# Altium PCB QUTMS-TSAL-B00.PcbDoc
Units mil, origin at the board's own origin, x right, y up, seen from the top; angles counter-clockwise.
Board outline 850 x 1875 mil, 2 copper layers (Top Layer, Bottom Layer); 28 components, 17 nets, 88 pads, 18 vias.
Unrouted connection lines stored in the file: 14.
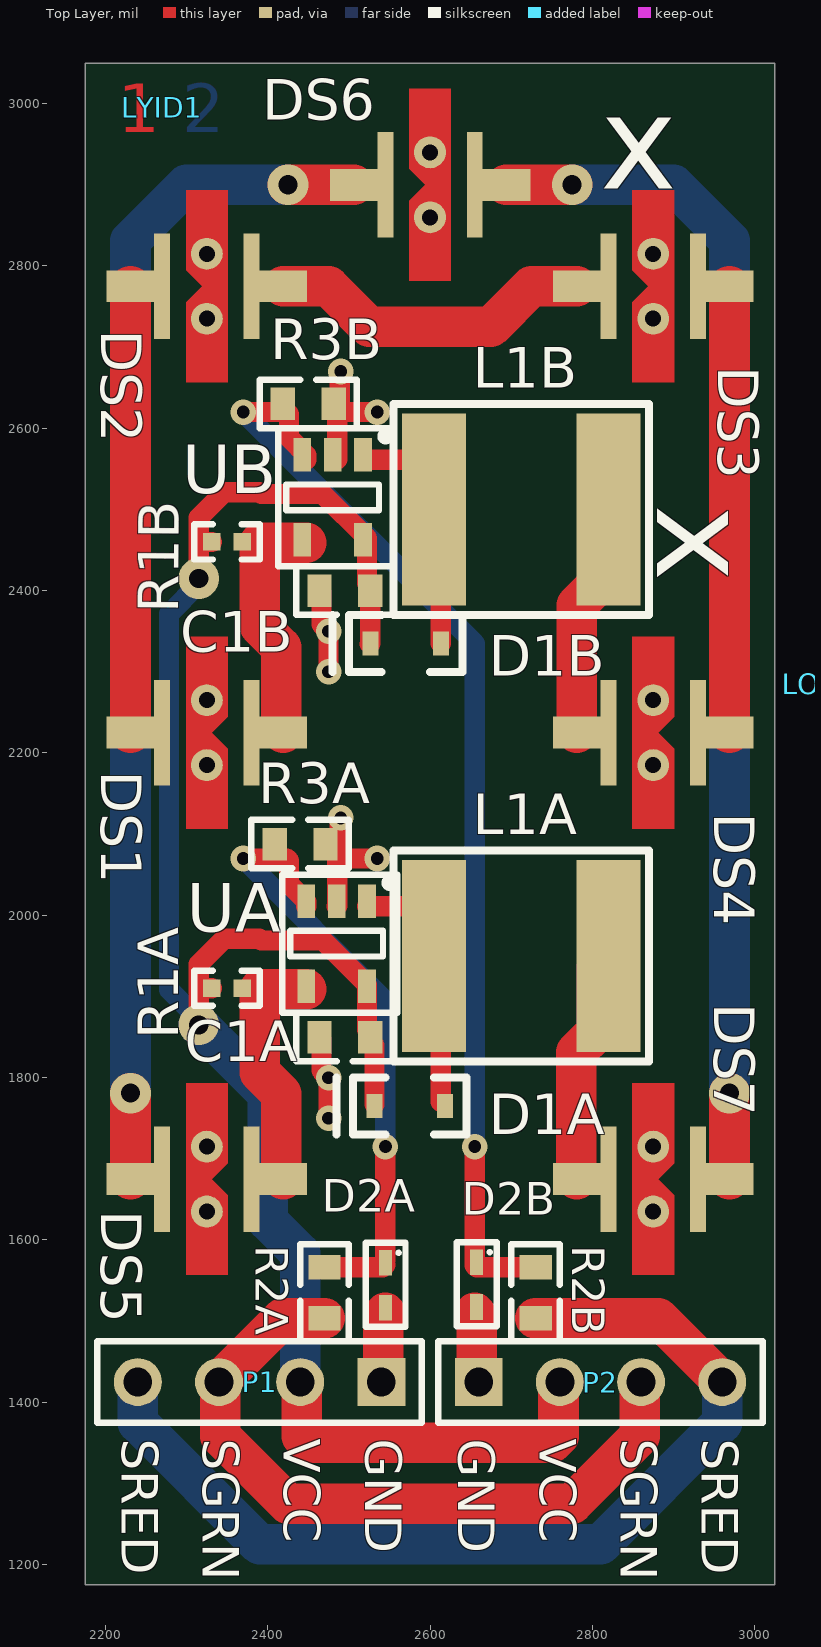
[diagram p0: Top Layer view]
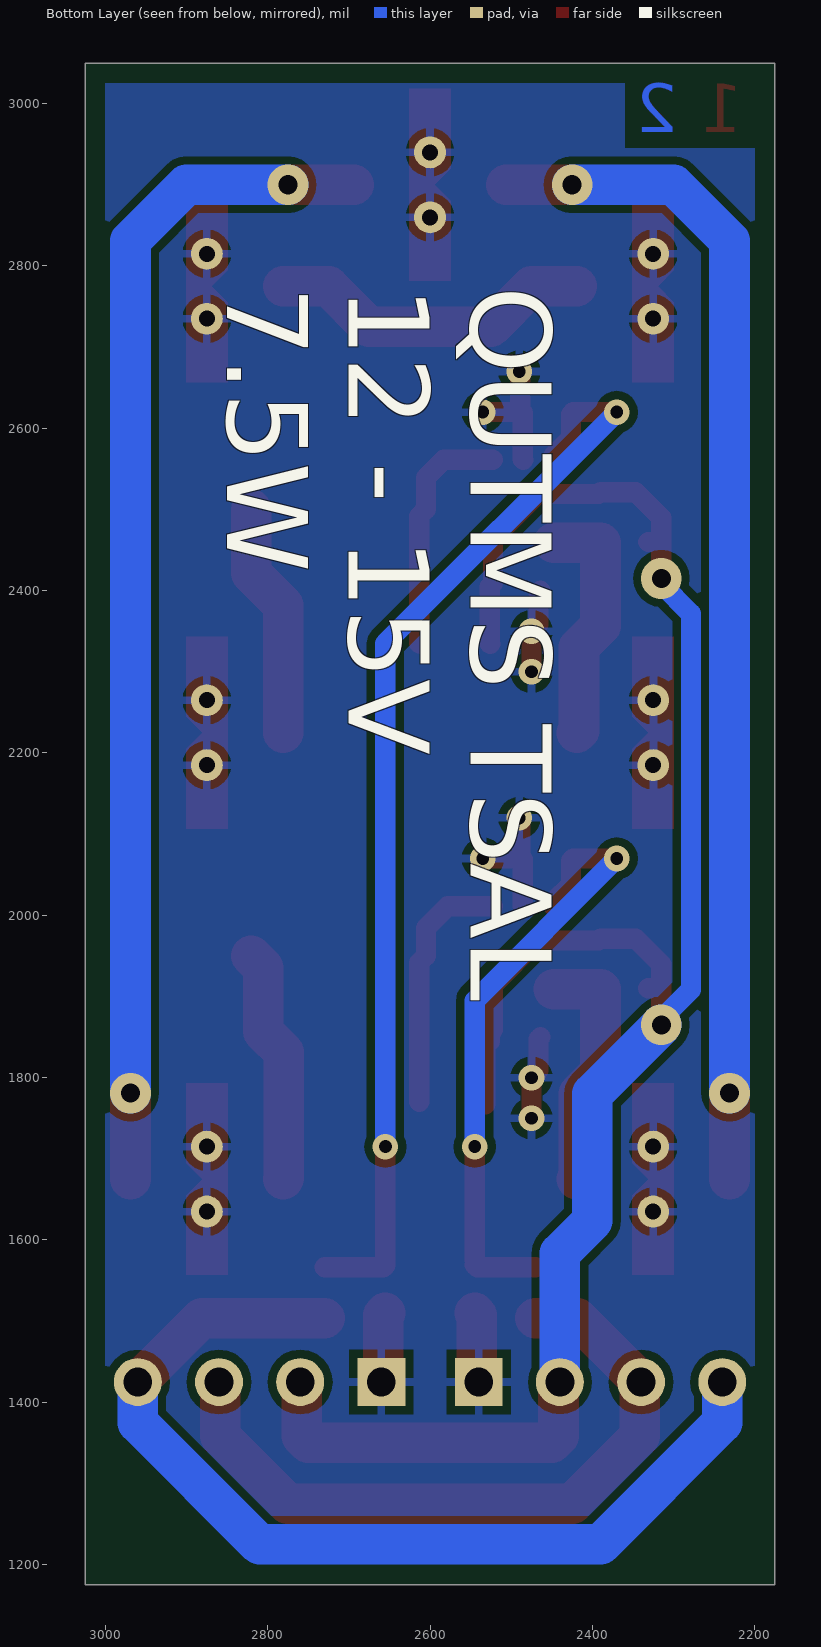
[diagram p1: Bottom Layer view, seen from below]
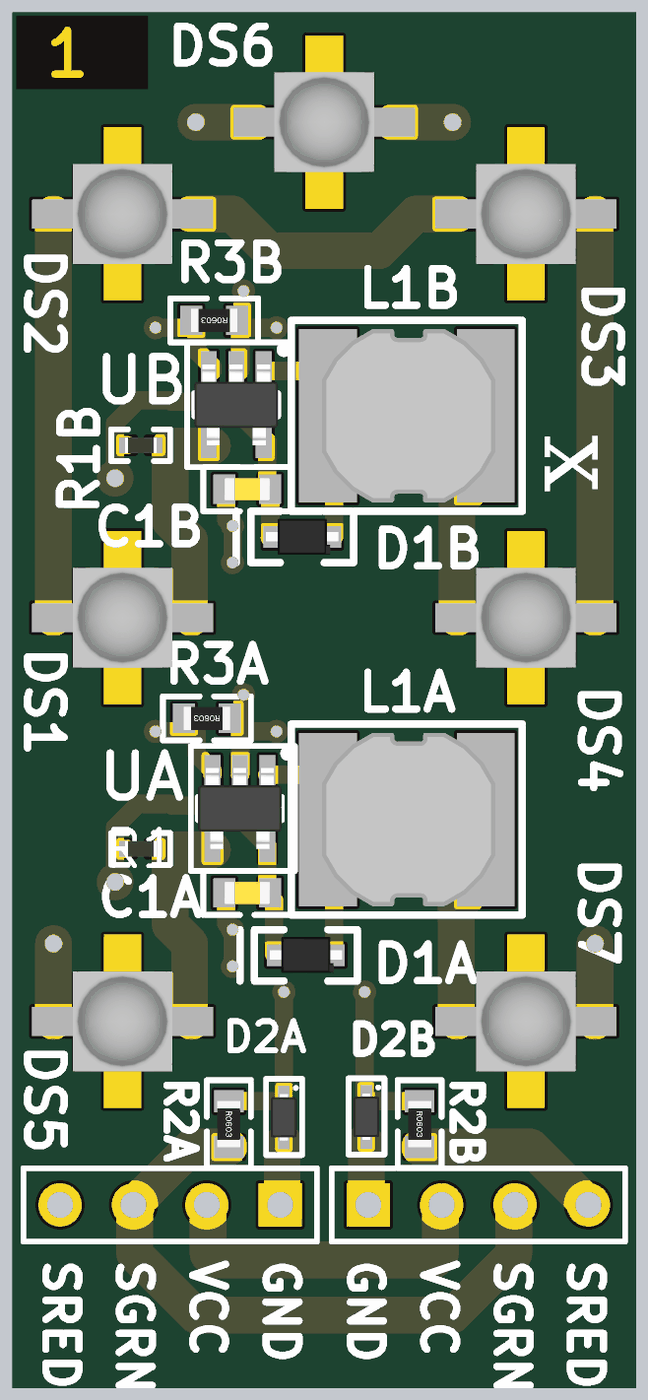
[diagram p2: 3D render of the assembled board from above, using the file's embedded part models]

## Layer stack, top to bottom
Top Solder: solder mask 0.4, Solder Resist, Dk 3.5
Top Layer: signal copper 1.4
Dielectric 1: dielectric 12.6, FR-4, Dk 4.8
Bottom Layer: signal copper 1.4
Bottom Solder: solder mask 0.4, Solder Resist, Dk 3.5

## Board outline
2175,3050 3025,3050 3025,1175 2175,1175

## Design rules (kind name [scope] priority, off if disabled: settings)
Clearance [All] p1: gap=10 ignorepadtopadclearanceinfootprint=FALSE except(0: Arc-Hole Track-Hole SMDPad-Hole THPad-Hole Via-Hole Fill-Hole Poly-Hole Region-Hole Text-Hole; 6: SMDPad-SMDPad)
PolygonConnect [All] p1: connectstyle=Relief reliefconductorwidth=10 reliefentries=4 polygonreliefangle="90 Angle" airgapwidth=10
RoomDefinition "Voltage ReducerB" [InComponentClass('Voltage ReducerB')] p1: confinementstyle=ConfineIn formatcopy=TRUE lockcomponents=FALSE outline 0,0 2000,0 2000,1000 0,1000
RoomDefinition "Voltage ReducerA" [InComponentClass('Voltage ReducerA')] p2: confinementstyle=ConfineIn formatcopy=TRUE lockcomponents=FALSE outline 0,0 2000,0 2000,1000 0,1000
RoomDefinition "RED LED DRIVER" [InComponentClass('RED LED DRIVER')] p3: confinementstyle=ConfineIn formatcopy=TRUE lockcomponents=FALSE outline 0,0 2000,0 2000,1000 0,1000
RoomDefinition "RED LED ARRAY" [InComponentClass('RED LED ARRAY')] p4: confinementstyle=ConfineIn formatcopy=TRUE lockcomponents=FALSE outline 0,0 2000,0 2000,1000 0,1000
RoomDefinition QUTMS-TSAL-S00 [InComponentClass('QUTMS-TSAL-S00')] p5: confinementstyle=ConfineIn formatcopy=TRUE lockcomponents=FALSE outline 0,0 2000,0 2000,1000 0,1000
RoomDefinition "GREEN LED DRIVER" [InComponentClass('GREEN LED DRIVER')] p6: confinementstyle=ConfineIn formatcopy=TRUE lockcomponents=FALSE outline 0,0 2000,0 2000,1000 0,1000
RoomDefinition "GREEN LED ARRAY" [InComponentClass('GREEN LED ARRAY')] p7: confinementstyle=ConfineIn formatcopy=TRUE lockcomponents=FALSE outline 0,0 2000,0 2000,1000 0,1000
RoutingVias [All] p1: holewidth=28 width=50 viastyle="Through Hole" minholewidth=15.75 minwidth=31.5 maxholewidth=28 maxwidth=50
SilkToSilkClearance [All] p1: silktosilkclearance=0
SilkToSolderMaskClearance [IsPad] p1: minsilkscreentomaskgap=5 clearancetoexposedcopper=TRUE
SolderMaskExpansion [All] p1: expansion=4 istentingtop=FALSE
Width [All] p1: maxlimit=50 minlimit=25 preferedwidth=25 minimp=50.000000 maximp=50.000000 favimp=50.000000
28 further rules are at their usual default settings.

## Classes and differential pairs
channel class QUTMS-TSAL-S04: "Voltage ReducerA" "Voltage ReducerB"
channel class QUTMS-TSAL-S01: "GREEN LED DRIVER" "RED LED DRIVER"
component class "Voltage ReducerB": D2B R2B
component class "Voltage ReducerA": D2A R2A
component class "RED LED ARRAY": DS1 DS2 DS3 DS4
component class "GREEN LED ARRAY": DS5 DS6 DS7
component class QUTMS-TSAL-S00: LOGO1 LOGO3 LYID1 P1 P2
component class "RED LED DRIVER": C1B D1B L1B R1B R3B UB
component class "GREEN LED DRIVER": C1A D1A L1A R1A R3A UA

## Components (designator, comment, footprint, x,y, rotation, side; value= is the part's Value field where it differs from the comment)
C1A "10uF X7R" Cap_Ceramic_0603 2495,1850 r0 top (schematic designator C1)
C1B "10uF X7R" Cap_Ceramic_0603 2495,2400 r0 top (schematic designator C1)
D1A "PMEG2005EJ" SOD-323F 2575,1764.99 r180 top (schematic designator D1)
D1B "PMEG2005EJ" SOD-323F 2570,2335 r180 top (schematic designator D1)
D2A "CMD21L8 TRPBFREE" SODFL160X80-2N 2545,1544.26 r270 top (schematic designator D2)
D2B "CMD21L8 TRPBFREE" SODFL160X80-2N 2657.25,1545 r270 top (schematic designator D2)
DS1 "XPEBRD-L1-0000-00601" "Cree XLamp XP-E2" 2325,2225 r180 top
DS2 "XPEBRD-L1-0000-00601" "Cree XLamp XP-E2" 2325,2775 r0 top
DS3 "XPEBRD-L1-0000-00601" "Cree XLamp XP-E2" 2875,2775 r0 top
DS4 "XPEBRD-L1-0000-00601" "Cree XLamp XP-E2" 2875,2225 r180 top
DS5 "XPEBGR-L1-0000-00A01" "Cree XLamp XP-E2" 2325,1675 r180 top
DS6 "XPEBGR-L1-0000-00A01" "Cree XLamp XP-E2" 2600,2900 r0 top
DS7 "XPEBGR-L1-0000-00A01" "Cree XLamp XP-E2" 2875,1675 r180 top
L1A "SRN6045-101M" "Bourns Inductor 6x6x4.5mm" 2715,1950 r180 top (schematic designator L1)
L1B "SRN6045-101M" "Bourns Inductor 6x6x4.5mm" 2715,2500 r180 top (schematic designator L1)
LOGO1 "LBL Hot Surface S" "LBL HOT SMALL" 3095,2285 r270 top
LOGO3 "LBL Hot Surface S" "LBL HOT SMALL" 3475,1625 r0 top
LYID1 "2 Layer Identification PCB Marker" "LAYER IDENT 2" 2270,2995 r0 top
P1 "Header 4" HDR1X4 2540,1425 r180 top
P2 "Header 4" HDR1X4 2660,1425 r0 top
R1A "0R27 1%" RESC1005X04N 2350,1910 r0 top (schematic designator R1)
R1B "0R27 1%" RESC1005X04N 2350,2460 r0 top (schematic designator R1)
R2A "10k" Res_ThinFilm_0603 2470,1535 r270 top (schematic designator R2)
R2B "10k" Res_ThinFilm_0603 2730,1535 r270 top (schematic designator R2)
R3A "10k" Res_ThinFilm_0603 2440,2087.82 r180 top (schematic designator R3)
R3B "10k" Res_ThinFilm_0603 2450,2630 r180 top (schematic designator R3)
UA "ZXLD1360" SOT95P280X100-5N 2485,1965 r270 top (schematic designator *)
UB "ZXLD1360" SOT95P280X100-5N 2480,2515 r270 top (schematic designator *)

## Footprints (in the part's own frame and the unit in brackets; to place one, negate y for a bottom-side part, rotate by r counter-clockwise, add the part's x,y. Pads: shape width x height; smd on the part's side, far side on the other; paste and mask are expansions set on the pad)
"Bourns Inductor 6x6x4.5mm" [mm]
  rect 2x6 smd: 1(-2.667,0) 2(2.794,0)
  silkscreen extent -3.94,-3.3 4.06,3.3, body extent -3,-3 3,3, height 4.5
Cap_Ceramic_0603 [mil]
  rect 30x40 smd: 1(-31.24,0) 2(31.24,0)
  silkscreen extent -60,-30 60,30, body extent -31,-16 32,16, height 33
"Cree XLamp XP-E2" [mm]
  rect 1.5x1 smd: A(-2.388,0) K(2.388,0)
  rect 0.5x3.3 smd: A(-1.4,0) K(1.4,0)
  round 1 hole 0.5: HS(0,1.016) HS(0,-1.016)
  Top Layer region: -0.65,3 0.65,3 0.65,-3 -0.65,-3 -0.65,-0.5 -0.15,0 -0.65,0.5
  body extent -1.73,-1.72 1.72,1.73, height 2.31
HDR1X4 [mm] "Connector; Header; 4 Position"
  rect 1.5x1.5 hole 0.9: 1(0,0)
  round 1.5 hole 0.9: 2(2.54,0) 3(5.08,0) 4(7.62,0)
  silkscreen extent -1.27,-1.27 8.89,1.27
"LAYER IDENT 2" [mil]
  Top Layer pour cut-out: -90,50 -90,-50 90,-50 90,50
  Bottom Layer pour cut-out: -90,50 -90,-50 90,-50 90,50
"LBL HOT SMALL" [mil]
Res_ThinFilm_0603 [mil]
  rect 30x40 smd: 1(-31.24,0) 2(31.24,0)
  silkscreen extent -60,-30 60,30, body extent -31,-16 32,16, height 18
RESC1005X04N [mm] "Chip Resistor, 2-Leads, Body 1.00x0.50mm, IPC Medium Density"
  rect 0.55x0.55 smd: 1(-0.475,0) 2(0.475,0)
  silkscreen extent -1.03,-0.55 1.02,0.55, body extent -0.55,-0.28 0.55,0.28, height 0.4
SOD-323F [mm]
  rect 0.5x0.75 smd: A(-1.1,0) K(1.1,0)
  silkscreen extent -1.78,-0.89 2.29,0.89, body extent -1.25,-0.64 1.25,0.61, height 0.68
SODFL160X80-2N [mm] "SODFL, 2-Leads, Body 0.80x1.60mm, IPC Medium Density"
  rect 0.8x0.4 smd: A(0.7,0) k(-0.7,0)
  silkscreen extent -1.33,-0.62 1.31,0.63, body extent -0.8,-0.45 0.8,0.45, height 0.8
SOT95P280X100-5N [mm] "SOT23, 5-Leads, Body 2.90x2.80mm, Pitch 0.95mm, IPC Medium Density"
  rect 1.05x0.55 smd: 1(-1.325,0.95) 2(-1.325,0) 3(-1.325,-0.95) 4(1.325,-0.95) 5(1.325,0.95)
  silkscreen extent -2.16,-1.7 2.16,1.91, body extent -1.4,-1.45 1.4,1.45, height 1

## Part data
C1A C1B: library part "10uF 50V 5% X7R 0603", "Capacitor, Ceramic, SMD, 10uF, 50V, 5%, X7R, 0603"
D1A D1B: "Diode, Schottky, SMD, 20 V, 500 mA, Single, SOD-323F, 2 Pins, 390 mV", ComponentLink1Description=Element14, ComponentLink1URL=https://au.element14.com/nexperia/pmeg2005ej-115/schottky-rect-20v-0-5a-sod323f/dp/1757760
DS1 DS2 DS3 DS4: "LED, Cree XLamp XP-E2 Series, Red, 630 nm, 130 °, 62 lm, 1 A", ComponentLink1Description=Element14, ComponentLink1URL=https://au.element14.com/cree/xpebrd-l1-0000-00601/led-smd-xlamp-xpe-e-red-62lm/dp/2335107
DS5 DS6 DS7: "LED, Cree XLamp XP-E2 Series, Green, 535 nm, 135 °, 87.4 lm, 1 A", ComponentLink1Description=Element14, ComponentLink1URL=https://au.element14.com/cree/xpebrd-l1-0000-00601/led-smd-xlamp-xpe-e-red-62lm/dp/2335107
L1A L1B: "Inductor, 100 µH, 700 mA, Semishielded, 800 mA, SRN6045 Series, 6mm x 6mm x 4.5mm", ComponentLink1Description=Element14, ComponentLink1URL=https://au.element14.com/bourns/srn6045-101m/inductor-100uh-semi-shielded-power/dp/2061658
LYID1: library part "Layer Identification 2"
P1 P2: "Header, 4-Pin", LatestRevisionDate=17-Jul-2002, LatestRevisionNote="Re-released for DXP Platform.", Publisher="Altium Limited"
R1A R1B: library part "0R27 1% 0603", "Resistor, SMD, 0R27, 0.1W, 1%, 0603"
R2A R2B R3A R3B: library part "10k 5% 0603", "Resistor, SMD, 10k, 0.1W, 5%, 0603"
UA UB: library part ZXLD136ET5TA

## Via types
v1: diameter 31.5, hole 15.75, Top Layer to Bottom Layer, tented both sides, 12 vias
v2: diameter 50, hole 23.62, Top Layer to Bottom Layer, tented both sides, 6 vias

## Nets (pads, with @x,y where several pads share a name; then routed paths per layer and width w, separated by ;. In a path a pad name is that pad's centre, name@x,y a point inside that pad or via, vN(x,y) a via of type N, cw(c..) or ccw(c..) an arc to the next point about the centre after c; other vN are vias at no path point)
GND: C1A.1 C1B.1 D2A.A D2B.A DS1.HS DS2.HS DS3.HS DS4.HS DS5.HS DS6.HS DS7.HS P1.1 P2.1 R3A.1 R3B.1 UA.2 UB.2 | length 702.8
  Top Layer w25: C1A.1 2466.26,1847.5 2466.26,1808.74 v1(2475,1800) v1(2475,1750) ; C1B.1 2466.26,2397.5 2466.26,2358.74 v1(2475,2350) v1(2475,2300) ; UA.2@2485,2011.18 2485.62,2011.8 2485.62,2069.38 2486.24,2070 ; UB.2@2485,2561.18 2485.62,2561.8 2485.62,2619.38 R3B.1@2486.24,2620 ; v1(2490,2120) 2488.76,2118.76 2488.76,2114.16 2488.74,2072.5 2486.24,2070 ; v1(2490,2670) 2490,2668.24 2488.74,2666.98 2488.74,2622.5 R3B.1@2486.24,2620 ; v1(2535,2070) 2486.24,2070 ; v1(2535,2620) R3B.1@2486.24,2620
  Top Layer w50: P1.1 2542.5,1427.5 2542.5,1507.5 D2A.A@2545,1510 ; D2B.A@2655,1510 2657.5,1507.5 2657.5,1427.5 P2.1
Net*A_3: D2A.k R2A.1 R3A.2 UA.3 | length 766.1
  Top Layer w25: v1(2370,2070) 2423.76,2070 2426.26,2067.5 2426.26,2038.42 2447.6,2017.09 UA.3@2447.6,2011.18 ; R2A.1 2542.07,1566.24 D2A.k@2545,1569.16 ; D2A.k@2545,1575.07 v1(2545,1715)
  Bottom Layer w25: v1(2370,2070) 2545,1895 v1(2545,1715)
Net*B_3: D2B.k R2B.1 R3B.2 UB.3 | length 1368
  Top Layer w25: v1(2370,2620) 2423.76,2620 2426.26,2617.5 2426.26,2588.42 2447.6,2567.09 UB.3@2447.6,2561.18 ; v1(2655,1715) 2655,1568.49 2657.25,1566.24 R2B.1
  Bottom Layer w25: v1(2370,2620) 2655,2335 v1(2655,1715)
NetDS1_K: DS1.K DS2.A | length 550
  Top Layer w50: DS1.K@2231,2225 DS2.A@2231,2775
NetDS2_K: DS2.K DS3.A | length 403.4
  Top Layer w50: DS2.K@2419,2775 2475,2775 2525,2725 2675,2725 2725,2775 DS3.A@2781,2775
NetDS3_K: DS3.K DS4.A | length 550
  Top Layer w50: DS4.A@2969,2225 DS3.K@2969,2775
NetDS5_K: DS5.K DS6.A | length 1459.6
  Top Layer w50: DS5.K@2231,1675 v2(2231,1781) ; v2(2425,2900) DS6.A@2506,2900
  Bottom Layer w50: v2(2231,1781) 2231,2831 2300,2900 v2(2425,2900)
NetDS6_K: DS6.K DS7.A | length 1353.6
  Top Layer w50: DS6.K@2694,2900 v2(2775,2900)
  Bottom Layer w50: v2(2775,2900) 2900,2900 2969,2831 2969,1781
SGRN: P1.3 P2.3 R2A.2 | length 883
  Top Layer w50: R2A.2 2418.76,1503.76 P1.3 2341.73,1423.27 2341.73,1358.27 2425,1275 2775,1275 2858.27,1358.27 2858.27,1423.27 P2.3
SRED: P1.4 P2.4 R2B.2 | length 1209.3
  Top Layer w50: P1.4@2238.27,1426.73 P1.4 P1.4@2241.73,1423.27 ; R2B.2 2881.24,1503.76 P2.4@2958.27,1426.73
  Bottom Layer w50: P1.4 2240,1375 2390,1225 2810,1225 2960,1375 P2.4
SWA: D1A.A L1A.2 UA.1 | length 311.5
  Top Layer w25: UA.1@2522.4,2011.18 2578.13,2011.18 2605,1984.31 L1A.2 2613.31,1941.69 D1A.A@2613.31,1770
SWB: D1B.A L1B.2 UB.1 | length 299.4
  Top Layer w25: UB.1@2522.4,2561.18 2583.13,2561.18 2605,2539.31 L1B.2 2613.31,2491.69 D1B.A
VCC: C1A.2 C1B.2 D1A.K D1B.K P1.2 P2.2 R1A.1 R1B.1 UA.5 UB.5 | length 2479.7
  Top Layer w25: v2(2315,1865) 2315,1910 ; v2(2315,2415) 2315,2460 ; R1A.1 2315,1910 ; R1B.1 2315,2460 ; D1B.K@2525.85,2334.15 D1B.K 2526.46,2335.23 2526.46,2399.77 C1B.2 2526.24,2405 2522.4,2408.83 2522.4,2464.72 2468.13,2519 2392.24,2519 2390,2521.24 2346.24,2521.24 2315,2490 2315,2460 ; C1A.2 2526.24,1845 2531.69,1839.54 D1A.K@2531.69,1767.25 ; C1A.2@2526.46,1854.77 2522.4,1858.83 UA.5 2522.4,1914.72 2468.13,1969 2392.24,1969 2390,1971.24 2346.24,1971.24 2315,1940 2315,1910
  Top Layer w50: P1.2 2441.73,1423.27 2441.73,1358.27 2450,1350 2750,1350 2758.27,1358.27 2758.27,1423.27 P2.2
  Bottom Layer w25: v2(2315,1865) 2315,1871.76 2278.5,1908.26 2278.5,2371.74 2315,2408.24 v2(2315,2415)
  Bottom Layer w50: v2(2315,1865) 2400,1780 2400,1623.73 2440,1583.73 P1.2
VLED-GREEN: DS5.A R1A.2 UA.4 | length 303.4
  Top Layer w50: DS5.A@2419,1675 2416.46,1677.54 2416.46,1780.31 2390,1806.78 2390,1908.76 2447.54,1908.76 UA.4@2447.6,1908.82
VLED-RED: DS1.A R1B.2 UB.4 | length 303.4
  Top Layer w50: DS1.A@2419,2225 2416.46,2227.54 2416.46,2330.31 2390,2356.78 2390,2458.76 2390.06,2458.82 UB.4@2447.6,2458.82
VOUT-GREEN: DS7.K L1A.1 | length 292
  Top Layer w50: DS7.K@2781,1675 2780,1676 2780,1831.26 2805.63,1856.89 2805.63,1935.63 L1A.1
VOUT-RED: DS4.K L1B.1 | length 397.2
  Top Layer w50: DS4.K@2781,2225 2781,2382.26 2820,2421.26 L1B.1 ; 2969,1675 v2(2969,1781)

## Polygon pours and split planes (outlines as drawn)
no net on Bottom Layer "NONET_L02_P000" (solid, pour order 0): 3000,3025 3000,1375 2825,1200 2375,1200 2200,1375 2200,3025

## Silkscreen, mask and mechanical layers (free items; w line width, h text height)
Top Overlay:
  text "SRED" at 2220,1355 h45 r270
  text "SGRN" at 2320,1355 h45 r270
  text "VCC" at 2420,1355 h45 r270
  text "GND" at 2520,1355 h45 r270
  text "GND" at 2635,1355 h45 r270
  text "VCC" at 2735,1355 h45 r270
  text "SGRN" at 2835,1355 h45 r270
  text "SRED" at 2935,1355 h45 r270
Bottom Overlay:
  text "QUTMS TSAL / 12 - 15V / 7.5W" at 2850,2775 h100 r90
Mechanical 1:
  the board outline again, w10

## Text inside footprints (layer, text, board x,y; h text height)
LOGO1: Top Overlay "x" at 2841.98,2505.52 h200 r270
LOGO3: Top Overlay "x" at 2809.48,2856.98 h200
LYID1: Top Layer "1" at 2215,2965 h60; Bottom Layer "2" at 2295,2965 h60